# Altium PCB PCB1.PcbDoc
Units mil, origin at the board's own origin, x right, y up, seen from the top; angles counter-clockwise.
Board outline 6000 x 4000 mil, 2 copper layers (Top Layer, Bottom Layer); 88 components, 123 nets, 472 pads, 0 vias.
Unrouted connection lines stored in the file: 252.
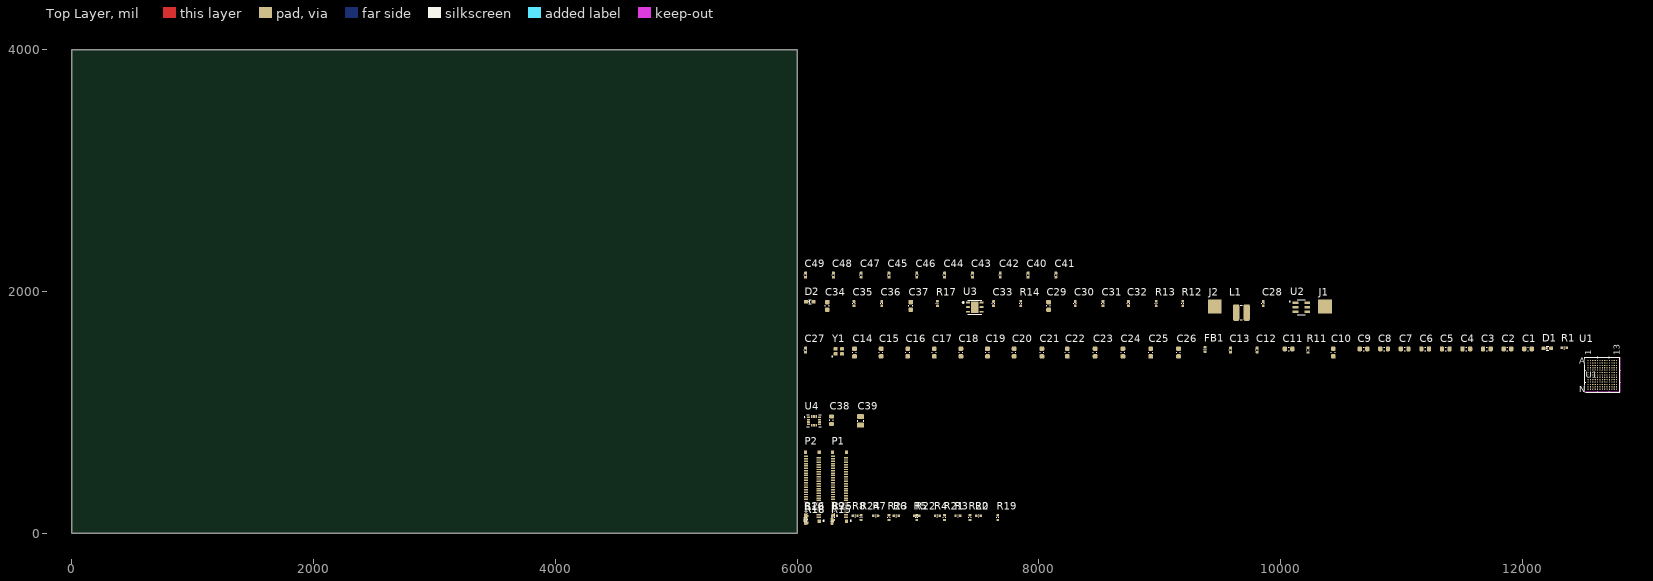
[diagram p0: Top Layer view]
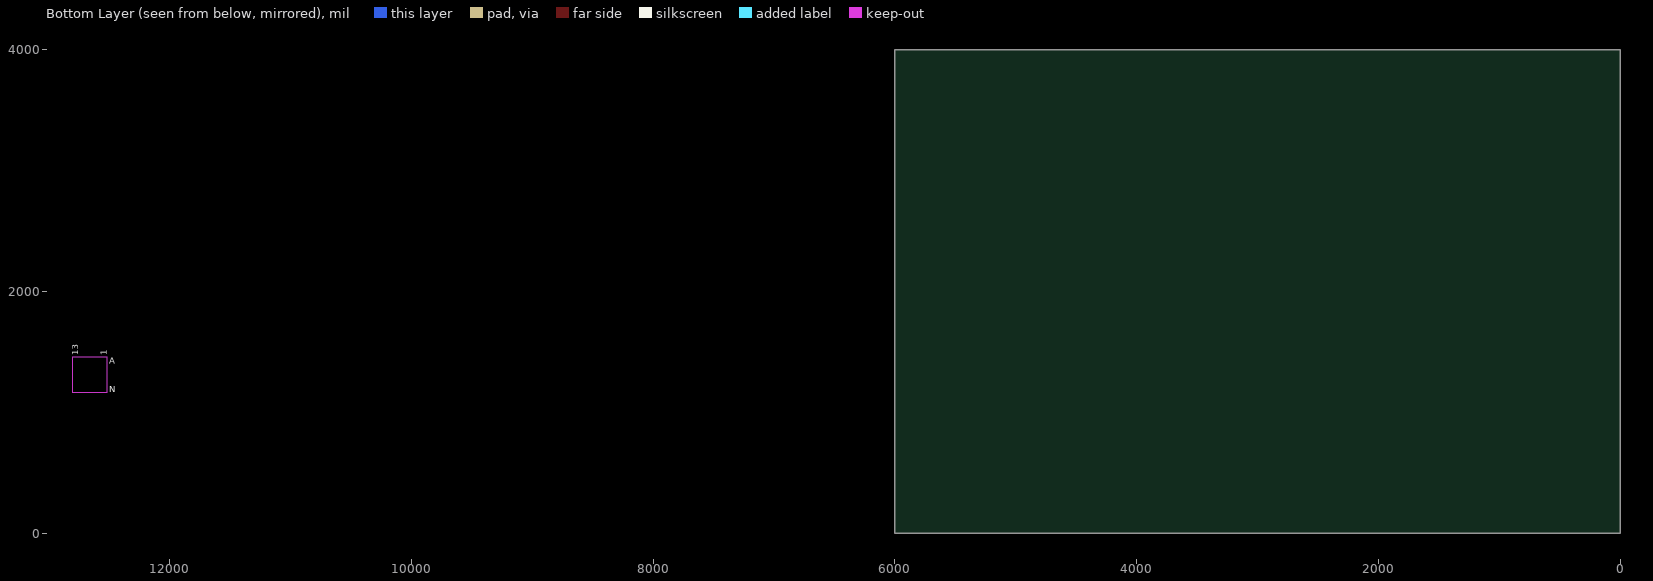
[diagram p1: Bottom Layer view, seen from below]

## Layer stack, top to bottom
Top Solder: solder mask 0.4, Solder Resist, Dk 3.5
Top Layer: signal copper 1.4
Dielectric 1: dielectric 12.6, FR-4, Dk 4.8
Bottom Layer: signal copper 1.4
Bottom Solder: solder mask 0.4, Solder Resist, Dk 3.5

## Board outline
0,0 6000,0 6000,4000 0,4000

## Design rules (kind name [scope] priority, off if disabled: settings)
Clearance [All] p1: gap=10 ignorepadtopadclearanceinfootprint=FALSE except(0: Arc-Hole Track-Hole SMDPad-Hole THPad-Hole Via-Hole Fill-Hole Poly-Hole Region-Hole Text-Hole)
DiffPairsRouting [All] p1: maxlimit=10 minlimit=10 mostfreqgap=10 toplayer_minwidth=15 toplayer_maxwidth=15 toplayer_prefwidth=15 bottomlayer_minwidth=15 bottomlayer_maxwidth=15 bottomlayer_prefwidth=15 maxuncoupledlength=500
PolygonConnect [All] p1: connectstyle=Relief reliefconductorwidth=10 reliefentries=4 polygonreliefangle="90 Angle" airgapwidth=10
RoomDefinition RS232 [InComponentClass('RS232')] p1: confinementstyle=ConfineIn formatcopy=TRUE lockcomponents=FALSE outline 6045,2090 8290,2090 8290,2280 6045,2280
RoomDefinition PWR [InComponentClass('PWR')] p2: confinementstyle=ConfineIn formatcopy=TRUE lockcomponents=FALSE outline 6045,1705 10435,1705 10435,2045 6045,2045
RoomDefinition MCU [InComponentClass('MCU')] p3: confinementstyle=ConfineIn formatcopy=TRUE lockcomponents=FALSE outline 6045,1150 12820,1150 12820,1660 6045,1660
RoomDefinition IMU [InComponentClass('IMU')] p4: confinementstyle=ConfineIn formatcopy=TRUE lockcomponents=FALSE outline 6045,860 6680,860 6680,1100 6045,1100
RoomDefinition Connector [InComponentClass('Connector')] p5: confinementstyle=ConfineIn formatcopy=TRUE lockcomponents=FALSE outline 6045,60 6460,60 6460,810 6045,810
RoutingVias [All] p1: holewidth=28 width=50 viastyle="Through Hole" minholewidth=28 minwidth=50 maxholewidth=28 maxwidth=50
SolderMaskExpansion [All] p1: expansion=4 istentingtop=FALSE
Width [All] p1: maxlimit=10 minlimit=10 preferedwidth=10
29 further rules are at their usual default settings.

## Classes and differential pairs
component class RS232: C40 C41 C42 C43 C44 C45 C46 C47 C48 C49 R19 R20 R21 R22 R23 R24 R25 R26 U6
component class PWR: C28 C29 C30 C31 C32 C33 C34 C35 C36 C37 D2 J1 J2 L1 R12 R13 R14 R15 R16 R17 R18 U2 U3
component class MCU: C1 C2 C3 C4 C5 C6 C7 C8 C9 C10 C11 C12 C13 C14 C15 C16 C17 C18 C19 C20 C21 C22 C23 C24 C25 C26 C27 D1 FB1 R1 R2 R3 R4 R5 R6 R7 R8 R9 R10 R11 U1 Y1
component class IMU: C38 C39 U4
component class Connector: P1 P2
differential pair ETHE2_TX: +ETHE2_TX_P -ETHE2_TX_N
differential pair ETHE2_RX: +ETHE2_RX_P -ETHE2_RX_N
differential pair ETHE1_TX: +ETHE1_TX_P -ETHE1_TX_N
differential pair ETHE1_RX: +ETHE1_RX_P -ETHE1_RX_N

## Components (designator, comment, footprint, x,y, rotation, side; value= is the part's Value field where it differs from the comment)
C1 "CAP0603 0.1uF 50V" CAP0603 12045,1525 r0 top value=0.1uF
C2 "CAP0603 2.2uF 25V" CAP0603 11875,1525 r0 top value=2.2uF
C3 "CAP0603 2.2uF 25V" CAP0603 11705,1525 r0 top value=2.2uF
C4 "CAP0603 2.2uF 25V" CAP0603 11535,1525 r0 top value=2.2uF
C5 "CAP0603 2.2uF 25V" CAP0603 11365,1525 r0 top value=2.2uF
C6 "CAP0603 0.1uF 50V" CAP0603 11195,1525 r0 top value=0.1uF
C7 "CAP0603 4.7uF 10V" CAP0603 11025,1525 r0 top value=4.7uF
C8 "CAP0603 1uF 50V" CAP0603 10855,1525 r0 top value=1uF
C9 "CAP0603 0.1uF 50V" CAP0603 10685,1525 r0 top value=0.1uF
C10 "CAP0603 0.1uF 50V" CAP0603 10435,1495 r90 top value=0.1uF
C11 "CAP0603 1uF 50V" CAP0603 10065,1525 r0 top value=1uF
C12 "CAP0402 0.1uF 50V" CAP0402 9805,1515 r90 top value=0.1uF
C13 "CAP0402 12pF 50V" CAP0402 9585,1515 r90 top value=12pF
C14 "CAP0603 1uF 50V" CAP0603 6475,1495 r90 top value=1uF
C15 "CAP0603 0.1uF 50V" CAP0603 6695,1495 r90 top value=0.1uF
C16 "CAP0603 4.7uF 10V" CAP0603 6915,1495 r90 top value=4.7uF
C17 "CAP0603 0.1uF 50V" CAP0603 7135,1495 r90 top value=0.1uF
C18 "CAP0603 0.1uF 50V" CAP0603 7355,1495 r90 top value=0.1uF
C19 "CAP0603 0.1uF 50V" CAP0603 7575,1495 r90 top value=0.1uF
C20 "CAP0603 0.1uF 50V" CAP0603 7795,1495 r90 top value=0.1uF
C21 "CAP0603 0.1uF 50V" CAP0603 8025,1495 r90 top value=0.1uF
C22 "CAP0603 0.1uF 50V" CAP0603 8235,1495 r90 top value=0.1uF
C23 "CAP0603 0.1uF 50V" CAP0603 8465,1495 r90 top value=0.1uF
C24 "CAP0603 0.1uF 50V" CAP0603 8695,1495 r90 top value=0.1uF
C25 "CAP0603 0.1uF 50V" CAP0603 8925,1495 r90 top value=0.1uF
C26 "CAP0603 0.1uF 50V" CAP0603 9155,1495 r90 top value=0.1uF
C27 "CAP0402 12pF 50V" CAP0402 6070,1515 r90 top value=12pF
C28 "CC0402KRX5R9BB104" CAP0402 9855,1900 r90 top
C29 "GRM188R6YA106MA73D" CAP0603 8080,1880 r90 top
C30 "CC0402KRX5R9BB104" CAP0402 8300,1900 r90 top
C31 "GRM158R61A226ME15D" CAP0402 8530,1900 r90 top
C32 "GRM158R61A226ME15D" CAP0402 8740,1900 r90 top
C33 "75pF" CAP0402 7625,1900 r90 top
C34 "GRM188R6YA106MA73D" CAP0603 6250,1880 r90 top
C35 "CC0402KRX5R9BB104" CAP0402 6470,1900 r90 top
C36 "CC0402KRX5R9BB104" CAP0402 6700,1900 r90 top
C37 "GRM188R6YA106MA73D" CAP0603 6940,1880 r90 top
C38 "C0603C104M5RACTU" CAP0603 6285,935 r90 top
C39 "CL21A476MQYNNNE" CAP0805 6525,930 r90 top
C40 "GRM155R71H104KE14D" CAP0402 7910,2135 r90 top
C41 "CC0402KRX5R8BB105" CAP0402 8140,2135 r90 top
C42 "GRM155R71H104KE14D" CAP0402 7680,2135 r90 top
C43 "GRM155R71H104KE14D" CAP0402 7450,2135 r90 top
C44 "GRM155R71H104KE14D" CAP0402 7220,2135 r90 top
C45 "GRM155R71H104KE14D" CAP0402 6760,2135 r90 top
C46 "CC0402KRX5R8BB105" CAP0402 6990,2135 r90 top
C47 "GRM155R71H104KE14D" CAP0402 6530,2135 r90 top
C48 "GRM155R71H104KE14D" CAP0402 6300,2135 r90 top
C49 "GRM155R71H104KE14D" CAP0402 6070,2135 r90 top
D1 "SML-310MTT86" "LED0603 GREEN" 12205,1530 r0 top
D2 "SML-310MTT86" "LED0603 GREEN" 6105,1915 r0 top
FB1 "BLM15PX121SZ1D" FERRIT0402 9375,1520 r90 top
J1 "CON1" "ESC PAD 3X4" 10365,1875 r0 top
J2 "CON1" "ESC PAD 3X4" 9455,1875 r0 top
L1 "SRN3012BTA-100M" SRN3012BTA-100M 9675,1825 r0 top
P1 "XSLS00-52-B" XSXL52 6355,385 r90 top
P2 "XSLS00-52-B" XSXL52 6130,385 r90 top
R1 "RES0402 4K7" RES0402 12345,1535 r0 top value=4K7
R2 "RES0402 0R" RES0402 7500,145 r0 top value=0R
R3 "RES0402 0R" RES0402 7330,145 r0 top value=0R
R4 "RES0402 0R" RES0402 7160,145 r0 top value=0R
R5 "RES0402 0R" RES0402 6990,145 r0 top value=0R
R6 "RES0402 0R" RES0402 6820,145 r0 top value=0R
R7 "RES0402 0R" RES0402 6650,145 r0 top value=0R
R8 "RES0402 0R" RES0402 6480,145 r0 top value=0R
R9 "RES0402 0R" RES0402 6310,145 r0 top value=0R
R10 "RES0603" RES0603 6075,115 r90 top value=1K
R11 "RES0402 4K7" RES0402 10225,1515 r90 top value=4K7
R12 "511K" RES0402 9190,1900 r90 top
R13 "49.9R" RES0402 8970,1900 r90 top
R14 "105K" RES0402 7850,1900 r90 top
R15 "100K" RES0402 6290,100 r90 top
R16 "13.3K" RES0402 6070,100 r90 top
R17 "RES0402 10K" RES0402 7160,1900 r90 top value=10K
R18 "RES0402" RES0402 6070,100 r90 top value=510
R19 "RES0402" RES0402 7660,130 r90 top value=0R
R20 "RES0402" RES0402 7430,130 r90 top value=0R
R21 "RES0402" RES0402 7220,130 r90 top value=0R
R22 "RES0402" RES0402 6990,130 r90 top value=0R
R23 "RES0402" RES0402 6760,130 r90 top value=0R
R24 "RES0402" RES0402 6530,130 r90 top value=0R
R25 "RES0402" RES0402 6300,130 r90 top value=0R
R26 "RES0402" RES0402 6070,130 r90 top value=0R
U1 "STM32H747AII6" UFBGA169 12660,1310 r0 top
U2 "TPS54302DDCR" "SOT95P280X110-6N - duplicate1" 10170,1870 r0 top
U3 "LD39200PUR" LD39200PUR 7470,1870 r0 top
U4 "ICM-42688-P" ICM-42688-P 6140,930 r0 top
Y1 "ECS-240-12-37B-CKY-TR" XTAL_ECS-240-12-37B-CKY-TR 6345,1505 r0 top

## Footprints (in the part's own frame and the unit in brackets; to place one, negate y for a bottom-side part, rotate by r counter-clockwise, add the part's x,y. Pads: shape width x height; smd on the part's side, far side on the other; paste and mask are expansions set on the pad)
CAP0402 [mm]
  rrect50% 0.6x0.6 smd mask+0.05: 1(0.45,0) 2(-0.45,0)
  silkscreen extent -0.04,-0.25 0.04,0.25, body extent -0.5,-0.25 0.5,0.25, height 0.55
CAP0603 [mm]
  rrect50% 0.9x1 smd mask+0.05: 1(-0.8,0) 2(0.8,0)
  silkscreen extent -0.1,-0.39 0.1,0.39, body extent -0.8,-0.4 0.8,0.4, height 0.8
CAP0805 [mm]
  rrect50% 1.1x1.5 smd mask+0.05: 1(-0.9,0) 2(0.9,0)
  silkscreen extent -0.15,-0.62 0.15,0.61, body extent -1,-0.62 1,0.63, height 0.9
"ESC PAD 3X4" [mm]
  rect 2.9x2.9 smd: 1(0,0)
FERRIT0402 [mm]
  rrect50% 0.54x0.6 smd mask+0.05: 1(-0.432,0) 2(0.432,0)
  silkscreen extent -0.06,-0.24 0.06,0.24, body extent -0.5,-0.25 0.5,0.25, height 0.5
ICM-42688-P [mm]
  rrect50% 0.59x0.35 smd mask+0.04: 1(-1.165,0.75) 2(-1.165,0.25) 3(-1.165,-0.25) 4(-1.165,-0.75) 8(1.165,-0.75) 9(1.165,-0.25) 10(1.165,0.25) 11(1.165,0.75)
  rrect50% 0.35x0.59 smd mask+0.04: 5(-0.5,-0.915) 6(0,-0.915) 7(0.5,-0.915) 12(0.5,0.915) 13(0,0.915) 14(-0.5,0.915)
  silkscreen extent -2.1,-1.25 1.5,1.25, body extent -1.5,-1.25 1.5,1.25, height 0.97
LD39200PUR [mm]
  rrect50% 0.84x0.4 smd: 1(-1.435,0.95) 2(-1.435,0) 3(-1.435,-0.95) 4(1.435,-0.95) 5(1.435,0) 6(1.435,0.95)
  rect 1.625x2.365 smd paste-2: 7(0,0)
  silkscreen extent -2.59,-1.5 1.5,1.5, body extent -1.5,-1.5 1.5,1.5, height 1
"LED0603 GREEN" [mm]
  rrect50% 0.8x0.82 smd mask+0.05: 1(0.8,0) 2(-0.8,0)
  silkscreen extent -0.34,-0.4 0.26,0.4, body extent -0.8,-0.4 0.8,0.4, height 0.7
RES0402 [mm]
  rrect50% 0.5x0.6 smd mask+0.05: 1(-0.5,0) 2(0.5,0)
  silkscreen extent -0.08,-0.24 0.08,0.24, body extent -0.5,-0.25 0.5,0.25, height 0.35
RES0603 [mm]
  rrect50% 0.65x0.9 smd mask+0.05: 1(-0.725,0) 2(0.725,0)
  silkscreen extent -0.15,-0.35 0.15,0.35, body extent -0.8,-0.45 0.8,0.45, height 0.5
"SOT95P280X110-6N - duplicate1" [mm]
  rrect25% 1.25x0.59 smd: 1(-1.255,0.95) 2(-1.255,0) 3(-1.255,-0.95) 4(1.255,-0.95) 5(1.255,0) 6(1.255,0.95)
  silkscreen extent -2.5,-1.57 0.8,1.57, body extent -1.4,-1.45 1.4,1.45, height 1.1
SRN3012BTA-100M [mm]
  rrect50% 1.3x3.5 smd mask+0.051: 1(-1.1,0) 2(1.1,0)
  silkscreen extent -0.2,-1.5 0.2,1.5, body extent -1.48,-1.48 1.48,1.47, height 1.11
UFBGA169 [mil]
  round 10 smd paste+0 mask+0: A1(-118.11,118.11) A2(-98.43,118.11) A3(-78.74,118.11) A4(-59.06,118.11) A5(-39.37,118.11) A6(-19.68,118.11) A7(0,118.11) A8(19.68,118.11) A9(39.37,118.11) A10(59.06,118.11) A11(78.74,118.11) A12(98.43,118.11) A13(118.11,118.11) B1(-118.11,98.43) B2(-98.43,98.43) B3(-78.74,98.43) B4(-59.06,98.43) B5(-39.37,98.43) B6(-19.68,98.43) B7(0,98.43) B8(19.68,98.43) B9(39.37,98.43) B10(59.06,98.43) B11(78.74,98.43) B12(98.43,98.43) B13(118.11,98.43) C1(-118.11,78.74) C2(-98.43,78.74) C3(-78.74,78.74) C4(-59.06,78.74) C5(-39.37,78.74) C6(-19.68,78.74) C7(0,78.74) C8(19.68,78.74) C9(39.37,78.74) C10(59.06,78.74) C11(78.74,78.74) C12(98.43,78.74) C13(118.11,78.74) D1(-118.11,59.06) D2(-98.43,59.06) D3(-78.74,59.06) D4(-59.06,59.06) D5(-39.37,59.06) D6(-19.68,59.06) D7(0,59.06) D8(19.68,59.06) D9(39.37,59.06) D10(59.06,59.06) D11(78.74,59.06) D12(98.43,59.06) D13(118.11,59.06) E1(-118.11,39.37) E2(-98.43,39.37) E3(-78.74,39.37) E4(-59.06,39.37) E5(-39.37,39.37) E6(-19.68,39.37) E7(0,39.37) E8(19.68,39.37) E9(39.37,39.37) E10(59.06,39.37) E11(78.74,39.37) E12(98.43,39.37) E13(118.11,39.37) F1(-118.11,19.68) F2(-98.43,19.68) F3(-78.74,19.68) F4(-59.06,19.68) F5(-39.37,19.68) F6(-19.68,19.68) F7(0,19.68) F8(19.68,19.68) F9(39.37,19.68) F10(59.06,19.68) F11(78.74,19.68) F12(98.43,19.68) F13(118.11,19.68) G1(-118.11,0) G2(-98.43,0) G3(-78.74,0) G4(-59.06,0) G5(-39.37,0) G6(-19.68,0) G7(0,0) G8(19.68,0) G9(39.37,0) G10(59.06,0) G11(78.74,0) G12(98.43,0) G13(118.11,0) H1(-118.11,-19.68) H2(-98.43,-19.68) H3(-78.74,-19.68) H4(-59.06,-19.68) H5(-39.37,-19.68) H6(-19.68,-19.68) H7(0,-19.68) H8(19.68,-19.68) H9(39.37,-19.68) H10(59.06,-19.68) H11(78.74,-19.68) H12(98.43,-19.68) H13(118.11,-19.68) J1(-118.11,-39.37) J2(-98.43,-39.37) J3(-78.74,-39.37) J4(-59.06,-39.37) J5(-39.37,-39.37) J6(-19.68,-39.37) J7(0,-39.37) J8(19.68,-39.37) J9(39.37,-39.37) J10(59.06,-39.37) J11(78.74,-39.37) J12(98.43,-39.37) J13(118.11,-39.37) K1(-118.11,-59.06) K2(-98.43,-59.06) K3(-78.74,-59.06) K4(-59.06,-59.06) K5(-39.37,-59.06) K6(-19.68,-59.06) K7(0,-59.06) K8(19.68,-59.06) K9(39.37,-59.06) K10(59.06,-59.06) K11(78.74,-59.06) K12(98.43,-59.06) K13(118.11,-59.06) L1(-118.11,-78.74) L2(-98.43,-78.74) L3(-78.74,-78.74) L4(-59.06,-78.74) L5(-39.37,-78.74) L6(-19.68,-78.74) L7(0,-78.74) L8(19.68,-78.74) L9(39.37,-78.74) L10(59.06,-78.74) L11(78.74,-78.74) L12(98.43,-78.74) L13(118.11,-78.74) M1(-118.11,-98.43) M2(-98.43,-98.43) M3(-78.74,-98.43) M4(-59.06,-98.43) M5(-39.37,-98.43) M6(-19.68,-98.43) M7(0,-98.43) M8(19.68,-98.43) M9(39.37,-98.43) M10(59.06,-98.43) M11(78.74,-98.43) M12(98.43,-98.43) M13(118.11,-98.43) N1(-118.11,-118.11) N2(-98.43,-118.11) N3(-78.74,-118.11) N4(-59.06,-118.11) N5(-39.37,-118.11) N6(-19.68,-118.11) N7(0,-118.11) N8(19.68,-118.11) N9(39.37,-118.11) N10(59.06,-118.11) N11(78.74,-118.11) N12(98.43,-118.11) N13(118.11,-118.11)
  Keep-Out Layer region: -145.45,-145.45 -145.45,145.45 145.45,145.45 145.45,-145.45
  silkscreen extent -149,-149 149,149, body extent -139,-139 139,139, height 24
XSXL52 [mm]
  rect 0.7x0.66 smd: 0(-7.222,-1.346) 0(-7.205,1.549) 0(7.234,-1.344) 0(7.234,1.549)
  rect 0.3x0.86 smd: 1(-6.38,-1.242) 2(-6.13,1.448) 3(-5.88,-1.242) 4(-5.63,1.448) 5(-5.38,-1.242) 6(-5.13,1.448) 7(-4.88,-1.242) 8(-4.63,1.448) 9(-4.38,-1.242) 10(-4.13,1.448) 11(-3.88,-1.242) 12(-3.63,1.448) 13(-3.38,-1.242) 14(-3.13,1.448) 15(-2.88,-1.242) 16(-2.63,1.448) 17(-2.38,-1.242) 18(-2.13,1.448) 19(-1.88,-1.242) 20(-1.63,1.448) 21(-1.38,-1.242) 22(-1.13,1.448) 23(-0.88,-1.242) 24(-0.63,1.448) 25(-0.38,-1.242) 26(-0.13,1.448) 27(0.12,-1.242) 28(0.37,1.448) 29(0.62,-1.242) 30(0.87,1.448) 31(1.12,-1.242) 32(1.37,1.448) 33(1.62,-1.242) 34(1.87,1.448) 35(2.12,-1.242) 36(2.37,1.448) 37(2.62,-1.242) 38(2.87,1.448) 39(3.12,-1.242) 40(3.37,1.448) 41(3.621,-1.242) 42(3.871,1.448) 43(4.121,-1.242) 44(4.371,1.448) 45(4.621,-1.242) 46(4.871,1.448) 47(5.121,-1.242) 48(5.371,1.448) 49(5.621,-1.242) 50(5.871,1.448) 51(6.121,-1.242) 52(6.371,1.448)
  silkscreen extent -7.3,-2.39 -7.05,-2.14, body extent -8.08,-1.37 8.07,1.68, height 0.85
XTAL_ECS-240-12-37B-CKY-TR [mm]
  rrect50% 0.85x0.75 smd mask+0.051: 1(-0.675,-0.525) 2(0.675,-0.525) 3(0.675,0.525) 4(-0.675,0.525)
  silkscreen extent -1.45,-1.19 -1.31,-1.04, body extent -1,-0.8 1,0.8, height 0.5

## Part data
C1 C6 C9 C10 C15 C17 C18 C19 C20 C21 C22 C23 C24 C25 C26: "Cap 0.1uF 50V 0603", Package=0603, Voltage=50V, MP=C0603C104M5RAC7867
C2 C3 C4 C5: "Cap 2.2uF 25V 0603", MP=GRM188R61E225KA12DGRM188R61E225KA12D
C7 C16: "Cap 4.7uF 10V 0603", MP=CC0603KRX5R6BB475
C8 C11 C14: "Cap 1uF 50V 0603", Package=0603, Tolerance=±10%, Voltage - Rated=50V, MP=C1608X5R1H105K080AB
C12: "Cap 0.1uF 50V 0402", Package=0402, Voltage=50V, MP=CC0402KRX5R9BB104
C13 C27: "Cap 12pF 50V 0402"
C28 C30 C35 C36: library part CMP-00265-1, "CAP CER 0.1UF 50V X5R 0402", Capacitance=100nF, Case/Package=0402, Dielectric=X5R, Manufacturer=Yageo, Max Operating Temperature=85°C, Min Operating Temperature=-55°C, Tolerance=10%, Voltage Rating=50V, Halogen Free="Halogen Free", Lead Free="Lead Free", Length=0.039inch, Manufacturer 1=Yageo, Manufacturer Part Number=CC0402KRX5R9BB104, Manufacturer Part Number 1=CC0402KRX5R9BB104, Mount="Surface Mount", Packaging="Tape and Reel", Thickness=0.022inch, Voltage Rating (DC)=50V, Width=0.02inch
C29 C34 C37: library part CMP-01031-1, "CAP CER 10UF 35V X5R 0603", Capacitance=10uF, Case Code (Imperial)=0603, Case Code (Metric)=1608, Dielectric=X5R, Manufacturer 1="Murata Electronics", Max Operating Temperature=85°C, Min Operating Temperature=-55°C, Package Quantity=1, Tolerance=20%, Voltage=35V, Case/Package=0603, Composition=Ceramic, Depth=0.8mm, Height=0.8mm, Lead Free="Lead Free", Length=1.6mm, Manufacturer Part Number 1=GRM188R6YA106MA73D, Mount="Surface Mount", Number of Pins=2, Packaging="Tape and Reel", REACH SVHC="No SVHC", Termination=SMD/SMT, Thickness=0.031inch, Voltage Rating=35V, Voltage Rating (DC)=35V, Weight=0.000222oz, Width=0.031inch
C31 C32: library part CMP-00520-1, "CAP CER 22UF 10V X5R 0402", Capacitance=22uF, Case Code (Imperial)=0402, Case Code (Metric)=1005, Dielectric=X5R, Manufacturer 1="TDK Corporation", Max Operating Temperature=85°C, Min Operating Temperature=-55°C, Tolerance=10%, Voltage=10V, Case/Package=0402, Depth=0.5mm, Length=1mm, Manufacturer Part Number 1=GRM158R61A226ME15D, Packaging="Tape and Reel", Radiation Hardening=No, REACH SVHC="No SVHC", Termination=SMD/SMT, Voltage Rating=10V
C33: library part CAP_Dup1_16, "CAP CER 75PF 25V C0G/NP0 0402", Dielectric Type=Capacitors, Manufacturer=YAGEO, Manufacturer PN=CC0402JRNPO9BN750, Package Size="0402 (1005 Metric)", Rated Voltage=25V, Temperature Coefficient="C0G, NP0", Tolerance=5%, CLASS=DISCRETE, PART_NUMBER=TMP-416
C38: library part CMP-00691-1, "CAP CER 0.1UF 50V X7R 0603", Capacitance=100nF, Case Code (Imperial)=0603, Case Code (Metric)=1608, Dielectric=X7R, Dielectric Material=Ceramic, Manufacturer 1=KEMET, Max Operating Temperature=125°C, Min Operating Temperature=-55°C, Package Quantity=1, Tolerance=20%, Voltage Rating=50V, Case/Package=0603, Contact Plating=Tin,Matte, Depth=0.8mm, Dissipation Factor=2.5%, Height=0.8mm, Lead Pitch=0.7mm, Length=1.6mm, Manufacturer Part Number 1=C0603C104M5RACTU, Mount="Surface Mount,PCB", Packaging="Tape and Reel", Radiation Hardening=No, REACH SVHC="No SVHC", Termination=SMD/SMT, Thickness=0.034inch, Voltage Rating (DC)=50V, Width=0.031inch
C39: library part 885012107014, "CAP CER 47UF 6.3V X5R 0805", Capacitance=47uF, Case Code (Imperial)=0805, Case Code (Metric)=2012, Dielectric=X5R, Max Operating Temperature=85°C, Min Operating Temperature=-55°C, Tolerance=20%, Voltage Rating=6.3V, Case/Package=0805, Category="Ceramic Capacitors", ComponentLink1Description=http://www.farnell.com/datasheets/1958454.pdf?src-supplier=Farnell, ComponentLink1URL=http://www.farnell.com/datasheets/1958454.pdf?src-supplier=Farnell, ComponentLink2Description=http://www.farnell.com/datasheets/1958454.pdf?src-supplier=Element14, ComponentLink2URL=http://www.farnell.com/datasheets/1958454.pdf?src-supplier=Element14, ComponentLink3Description=https://katalog.we-online.de/pbs/datasheet/885012107014.pdf?src-supplier=Digi-Key, ComponentLink3URL=https://katalog.we-online.de/pbs/datasheet/885012107014.pdf?src-supplier=Digi-Key, ComponentLink4Description=http://www.farnell.com/datasheets/1958454.pdf?src-supplier=Newark, ComponentLink4URL=http://www.farnell.com/datasheets/1958454.pdf?src-supplier=Newark, Length=0.079inch, Manufacturer Part Number=CL21A476MQYNNNE, Mount="Surface Mount", Packaging="Cut Tape", Pricing 1="1=0.37000, 5=0.35200, 10=0.33000, 25=0.31900, 50=0.30900, 100=0.29800 (USD)", RoHS=Yes, RoHS Compliant=Yes, Series=WCAP-CSGP, Stock 1=3580, Supplier 1=Newark, Thickness=0.057inch, Voltage Rating (DC)=6.3V, Width=0.049inch
C40 C42 C43 C44 C45 C47 C48 C49: library part CMP-01036-1, "CAP CER 0.1UF 50V X7R 0402", Capacitance=100nF, Case Code (Imperial)=0402, Case Code (Metric)=1005, Dielectric=X7R, Dielectric Material=Ceramic, Manufacturer 1="Murata Electronics", Max Operating Temperature=125°C, Min Operating Temperature=-55°C, Package Quantity=10000, Tolerance=10%, Voltage=50V, Case/Package=0402, Composition=Ceramic, Depth=0.5mm, Dissipation Factor=0.025%, Height=0.5mm, Lead Free="Lead Free", Length=1mm, Manufacturer Part Number 1=GRM155R71H104KE14D, Material=Ceramic, Mount="Surface Mount", Packaging="Tape and Reel", REACH SVHC="No SVHC", Termination=SMD/SMT, Thickness=0.022inch, Voltage Rating=50V, Voltage Rating (DC)=50V, Weight=0.000212oz, Width=0.5mm
C41 C46: library part CMP-00520-1, "CAP CER 1UF 25V X5R 0402", Capacitance=1uF, Case Code (Imperial)=0402, Case Code (Metric)=1005, Dielectric=X5R, Manufacturer 1="TDK Corporation", Max Operating Temperature=85°C, Min Operating Temperature=-55°C, Tolerance=10%, Voltage=25V, Case/Package=0402, Depth=0.5mm, Length=1mm, Manufacturer Part Number 1=CC0402KRX5R8BB105, Packaging="Tape and Reel", Radiation Hardening=No, REACH SVHC="No SVHC", Termination=SMD/SMT, Voltage Rating=25V
D1 D2: library part CMP-01130-2, "LED GREEN CLEAR 0603 SMD", Case Code (Imperial)=0603, Case Code (Metric)=1608, Color=Green,Yellow, Forward Current=20mA, Forward Voltage=2.2V, Illumination Color=Green, Lens Color=Colorless,Clear, Manufacturer 1="Rohm Semiconductor", Max Operating Temperature=85°C, Min Operating Temperature=-30°C, Package Quantity=3000, Case/Package=0603, Dominant Wavelength=570nm, Height=0.9mm, Lead Free="Lead Free", Length=1.6mm, Lens Style=Rectangular,Clear,Diffused,Colorless, Lens Transparency=Clear, Luminous Intensity=16mcd, Manufacturer Part Number 1=SML-310MTT86, Mount="Surface Mount", Number of LEDs=1, Number of Pins=2, Packaging="Tape and Reel", Radiation Hardening=No, Test Current=20mA, Viewing Angle=140°, Wavelength=570nm, Width=0.8mm
FB1: "120 Ohms @ 100 MHz 1 Power Line Ferrite Bead 0402 (1005 Metric) 2A 55mOhm", Current Rating (Max)=2A, DC Resistance (DCR) (Max)=55mOhm, Impedance @ Frequency="120 Ohms @ 100 MHz", MP=BLM15PX121SZ1D
J1 J2: "SOLDER PADS"
L1: library part SRN3012BTA-330M, "10uH", Manufacturer_Name=Bourns, Datasheet Link=https://www.bourns.com/docs/Product-Datasheets/SRN3012BTA.pdf, Geometry.Height=1.2mm, Manufacturer_Part_Number=SRN3012BTA-100M, Mouser Part Number=SRN3012BTA-100M, Mouser Price/Stock=https://www.mouser.co.uk/ProductDetail/Bourns/SRN3012BTA-330M?qs=Imq1NPwxi74rPoSZ4PPaRw%3D%3D
R1 R11: "RES 4K7 0402", MP=RC0402JR-074K7L
R2 R3 R4 R5 R6 R7 R8 R9: "RES 0R 0402", MP=RC0402JR-070RL
R10: "RES 0805", MP="add later"
R12: library part CMP-00299-1_1, "RES SMD 511K OHM 1% 1/16W 0402", Case Code (Imperial)=0402, Case Code (Metric)=1005, Manufacturer=Yageo, Manufacturer Part Number=RC0402FR-07511KL, Max Operating Temperature=155°C, Max Power Dissipation=63mW, Min Operating Temperature=-55°C, Package Quantity=1, Power Rating=62.5mW, Temperature Coefficient=100ppm/°C, Tolerance=1%, Voltage Rating=50V, Case/Package=0402, Composition="Thick Film", Depth=0.5mm, Features="Moisture Resistant", Height=0.016inch, Lead Free="Lead Free", Length=1mm, Manufacturer 1=Yageo, Manufacturer Part Number 1=RC0402FR-07511KL, Military Standard=Not, Number of Terminations=2, Packaging="Tape and Reel", Resistance=511K, Termination=SMD/SMT, Voltage Rating (DC)=50V, Width=0.02inch, Working Voltage=50V
R13: library part CMP-00299-1_1, "RES SMD 49.9R OHM 1% 1/16W 0402", Case Code (Imperial)=0402, Case Code (Metric)=1005, Manufacturer=Yageo, Manufacturer Part Number=RC0402FR-0749R9L, Max Operating Temperature=155°C, Max Power Dissipation=63mW, Min Operating Temperature=-55°C, Package Quantity=1, Power Rating=62.5mW, Temperature Coefficient=100ppm/°C, Tolerance=1%, Voltage Rating=50V, Case/Package=0402, Composition="Thick Film", Depth=0.5mm, Features="Moisture Resistant", Height=0.016inch, Lead Free="Lead Free", Length=1mm, Manufacturer 1=Yageo, Manufacturer Part Number 1=RC0402FR-0749R9L, Military Standard=Not, Number of Terminations=2, Packaging="Tape and Reel", Resistance=49.9R, Termination=SMD/SMT, Voltage Rating (DC)=50V, Width=0.02inch, Working Voltage=50V
R14: library part CMP-00299-1_1, "RES SMD 105K OHM 1% 1/16W 0402", Case Code (Imperial)=0402, Case Code (Metric)=1005, Manufacturer=Yageo, Manufacturer Part Number=RC0402FR-07105KL, Max Operating Temperature=155°C, Max Power Dissipation=63mW, Min Operating Temperature=-55°C, Package Quantity=1, Power Rating=62.5mW, Temperature Coefficient=100ppm/°C, Tolerance=1%, Voltage Rating=50V, Case/Package=0402, Composition="Thick Film", Depth=0.5mm, Features="Moisture Resistant", Height=0.016inch, Lead Free="Lead Free", Length=1mm, Manufacturer 1=Yageo, Manufacturer Part Number 1=RC0402FR-07105KL, Military Standard=Not, Number of Terminations=2, Packaging="Tape and Reel", Resistance=105K, Termination=SMD/SMT, Voltage Rating (DC)=50V, Width=0.02inch, Working Voltage=50V
R15: library part CMP-00299-1_1, "RES SMD 100K OHM 1% 1/16W 0402", Case Code (Imperial)=0402, Case Code (Metric)=1005, Manufacturer=Yageo, Manufacturer Part Number=RC0402FR-0749R9L, Max Operating Temperature=155°C, Max Power Dissipation=63mW, Min Operating Temperature=-55°C, Package Quantity=1, Power Rating=62.5mW, Resistance=49.9R, Temperature Coefficient=100ppm/°C, Tolerance=1%, Voltage Rating=50V, Case/Package=0402, Composition="Thick Film", Depth=0.5mm, Features="Moisture Resistant", Height=0.016inch, Lead Free="Lead Free", Length=1mm, Manufacturer 1=Yageo, Manufacturer Part Number 1=RC0402FR-0749R9L, Military Standard=Not, Number of Terminations=2, Packaging="Tape and Reel", Termination=SMD/SMT, Voltage Rating (DC)=50V, Width=0.02inch, Working Voltage=50V
R16: library part CMP-00299-1_1, "RES SMD 13.3K OHM 1% 1/16W 0402", Case Code (Imperial)=0402, Case Code (Metric)=1005, Manufacturer=Yageo, Manufacturer Part Number=RC0402FR-0749R9L, Max Operating Temperature=155°C, Max Power Dissipation=63mW, Min Operating Temperature=-55°C, Package Quantity=1, Power Rating=62.5mW, Resistance=49.9R, Temperature Coefficient=100ppm/°C, Tolerance=1%, Voltage Rating=50V, Case/Package=0402, Composition="Thick Film", Depth=0.5mm, Features="Moisture Resistant", Height=0.016inch, Lead Free="Lead Free", Length=1mm, Manufacturer 1=Yageo, Manufacturer Part Number 1=RC0402FR-0749R9L, Military Standard=Not, Number of Terminations=2, Packaging="Tape and Reel", Termination=SMD/SMT, Voltage Rating (DC)=50V, Width=0.02inch, Working Voltage=50V
R17: "RES 10K 0402", MP=RC0402FR-0710KL
R18 R19 R20 R21 R22 R23 R24 R25 R26: "RES 0402", MP="add later"
U1: "High-performance and DSP with DP-FPU, Arm Cortex-M7 + Cortex-M4 MCU with 2MBytes of Flash memory, 1MB RAM, 480 MHz CPU, Art Accelerator, L1 cache, external memory interface, large set of peripherals, SMPS, MIPI-DSI", Manufacturer_Name=STMicroelectronics, Copyright="Copyright (C) 2026 Ultra Librarian. All rights reserved.", Manufacturer_Part_Number=STM32H747AII6, RefDes=RefDes, Type=Type
U2: "4.5-V to 28-V Input, 3-A Output, EMI Friendly Synchronous Step-Down Converter", Package="SOT-23-THN-6 Texas Instruments", Availability="In Stock", Check_prices=https://www.snapeda.com/parts/TPS54302DDCR/Texas+Instruments/view-part/?ref=eda, MF="Texas Instruments", MP=TPS54302DDCR, Price=None, Purchase-URL=https://pricing.snapeda.com/search?q=TPS54302DDCR&ref=eda, SnapEDA_Link=https://www.snapeda.com/parts/TPS54302DDCR/Texas+Instruments/view-part/?ref=snap
U3: "LDO IC 1 Output 2A 6-DFN _3x3_", Package="DFN-6 STMicroelectronics", Availability=Unavailable, MF=STMicroelectronics, MP=LD39200PUR, Price=None, SnapEDA_Link=https://www.snapeda.com/parts/LD39200PUR/STMicroelectronics/view-part/882017/?ref=snap
U4: "Accelerometer, Gyroscope, 6 Axis Sensor Output", Package=None, Availability=Unavailable, MP=ICM-42688-P, Price=None
Y1: "Crystal 24 MHz ±10ppm 12pF 50 Ohms 4-SMD, No Lead", ESR (Equivalent Series Resistance)="50 Ohms", Frequency="24 MHz", Frequency Stability=±10ppm, Load Capacitance=12pF, Operating Temperature="-30°C ~ 85°C", Frequency Tolerance=±10ppm, MP=ECS-240-12-37B-CKY-TR, Size / Dimension="2.00mm x 1.60mm"

## Nets (pads, with @x,y where several pads share a name; then routed paths per layer and width w, separated by ;. In a path a pad name is that pad's centre, name@x,y a point inside that pad or via, vN(x,y) a via of type N, cw(c..) or ccw(c..) an arc to the next point about the centre after c; other vN are vias at no path point)
12V: C29.1 C30.1 J1.1 R12.1 U2.3
+5V_SYS: C31.1 C32.1 C34.1 C35.1 L1.2 R13.1 R17.2 U3.6
C_Main_SWCLK: P1.20 U1.A11
C_Main_SWDIO: P1.18 U1.B11
C_Roll_TIM4_CH1: P2.24 U1.J10
C_Roll_TIM4_CH2: P2.26 U1.J9
C_Roll_TIM4_CH3: P2.28 U1.H9
C_Yaw_TIM1_CH1: P1.24 U1.N6
C_Yaw_TIM1_CH2: P1.26 U1.N7
C_Yaw_TIM1_CH3: P1.28 U1.H8
CAM_TRIGGER: P1.41 P2.41
CAN_H: P1.39 P2.39
CAN_L: P1.37 P2.37
ETHE1_RX_N: P1.9 P2.9
ETHE1_RX_P: P1.7 P2.7
ETHE1_TX_N: P1.3 P2.3
ETHE1_TX_P: P1.1 P2.1
ETHE2_RX_N: P1.25 P2.25
ETHE2_RX_P: P1.23 P2.23
ETHE2_TX_N: P1.19 P2.19
ETHE2_TX_P: P1.17 P2.17
GND: C1.1 C5.1 C6.1 C7.1 C8.1 C9.1 C12.1 C13.2 C14.1 C15.1 C16.1 C17.1 C18.1 C19.1 C20.1 C21.1 C22.1 C23.1 C24.1 C25.1 C26.1 C27.2 C29.2 C30.2 C31.2 C32.2 C34.2 C35.2 C36.2 C37.2 C38.2 C39.2 C40.2 C41.2 C44.2 C45.2 C46.2 C49.2 D1.1 D2.1 J2.1 P1.5 P1.22 P1.30 P1.35 P1.36 P1.42 P1.43 P1.48 P2.5 P2.18 P2.30 P2.35 P2.40 P2.43 P2.48 R1.1 R14.2 R16.2 U1.A1 U1.A7 U1.A12 U1.B4 U1.B9 U1.C12 U1.D1 U1.E13 U1.F1 U1.F2 U1.F3 U1.G12 U1.G13 U1.H2 U1.H11 U1.J11 U1.K11 U1.L1 U1.L13 U1.M6 U1.M9 U1.N1 U2.1 U3.3 U3.7 U4.2 U4.3 U4.6 U4.7 U4.10 U4.11 Y1.2 Y1.4
I2C1_SCL: P1.51 U1.E5
I2C1_SDA: P1.49 U1.C5
I2C2_SCL: P1.47 U1.F5
I2C2_SDA: P1.45 U1.F4
I2C3_SCL: P2.51 U1.D10
I2C3_SDA: P2.49 U1.E11
I2C4_SCL: P2.47 U1.N5
I2C4_SDA: P2.45 U1.M7
IMU1_INT1: U1.L3 U4.4
IMU1_INT2_FSYNC: U1.K3 U4.9
MCU1_Main_Left_SWCLK: P1.4 P2.4
MCU1_Main_Left_SWDIO: P1.2 P2.2
MCU1_Main_Right_SWCLK: P1.12 P2.12
MCU1_Main_Right_SWDIO: P1.10 P2.10
MCU2_Main_Left_SWCLK: P1.8 P2.8
MCU2_Main_Left_SWDIO: P1.6 P2.6
MCU2_Main_Right_SWCLK: P1.16 P2.16
MCU2_Main_Right_SWDIO: P1.14 P2.14
NetC2_1: C2.1 U1.A4
NetC2_2: C2.2 C3.2 C4.2
NetC3_1: C3.1 U1.C13
NetC4_1: C4.1 U1.N9
NetC10_1: C10.1 C11.1
NetC28_1: C28.1 U2.6
NetC28_2: C28.2 L1.1 U2.2
NetC33_1: C33.1 R15.2 R16.1 U2.4
NetC33_2: C33.2 R13.2 R15.1
NetC40_1: C40.1
NetC42_1: C42.1
NetC42_2: C42.2
NetC43_1: C43.1
NetC43_2: C43.2
NetC44_1: C44.1
NetC45_1: C45.1
NetC47_1: C47.1
NetC47_2: C47.2
NetC48_1: C48.1
NetC48_2: C48.2
NetC49_1: C49.1
NetD1_2: D1.2 R10.2
NetD2_2: D2.2 R18.2
NetP1_27: P1.27 U1.B6
NetP1_29: P1.29 U1.A6
NetP1_32: P1.32 U1.N4
NetP1_34: P1.34 U1.H6
NetP1_44: P1.44 U1.D5
NetP1_46: P1.46 U1.D6
NetP1_50: P1.50 U1.L5
NetP1_52: P1.52 U1.A5
NetR1_2: R1.2 U1.B5
NetR2_1: R2.1 R23.1
NetR3_1: R3.1 R24.1
NetR4_2: R4.2 R21.1
NetR5_2: R5.2 R22.1
NetR6_2: R6.2 R19.1
NetR7_2: R7.2 R20.1
NetR8_1: R8.1 R25.1
NetR9_1: R9.1 R26.1
NetR10_1: R10.1 U1.D9
NetR12_2: R12.2 R14.1 U2.5
NetR17_1: R17.1 U3.5
NetR19_2: R19.2
NetR20_2: R20.2
NetR21_2: R21.2
NetR22_2: R22.2
NetR23_2: R23.2
NetR24_2: R24.2
NetR25_2: R25.2
NetR26_2: R26.2
NRST: C12.2 R11.1 U1.H5
PH0: C27.1 U1.J2 Y1.1
PH1: C13.1 U1.J1 Y1.3
PWM_1: P1.15 P2.15
PWM_2: P1.31 P2.31
RS232_ENC_Left_RX: P2.13
RS232_ENC_Left_TX: P2.11
RS232_ENC_Right_RX: P2.29
RS232_ENC_Right_TX: P2.27
RS232_RX1: P2.38
RS232_RX2: P2.44
RS232_TX1: P2.36
RS232_TX2: P2.42
RX_AI: P1.40 U1.B8
SBUS_1: P1.21 P2.21
SBUS_2: P1.33 P2.33
SPI1_CS: U1.N3 U4.12
SPI1_MISO: U1.M4 U4.1
SPI1_MOSI: U1.K4 U4.14
SPI1_SCK: U1.J5 U4.13
TX_AI: P1.38 U1.C8
USART1_RX: R7.1 U1.M11
USART1_TX: R6.1 U1.N11
USART2_RX: R3.2 U1.N2
USART2_TX: R2.2 U1.M3
USART3_RX: R5.1 U1.N8
USART3_TX: R4.1 U1.K9
USART6_RX: R9.2 U1.E10
USART6_TX: R8.2 U1.F11
VCAP_DSI: C5.2 C6.2 U1.L12
VDD: C1.2 C7.2 C8.2 C9.2 C10.2 C11.2 C16.2 C17.2 C18.2 C19.2 C20.2 C21.2 C22.2 C23.2 C24.2 C25.2 C26.2 C36.1 C37.1 C38.1 C39.1 C41.1 C46.1 FB1.2 R11.2 R18.1 U1.A3 U1.A9 U1.B1 U1.B2 U1.B7 U1.B12 U1.B13 U1.E2 U1.E12 U1.F12 U1.F13 U1.H1 U1.L9 U1.L11 U1.M2 U1.M13 U1.N10 U3.1 U3.2 U4.5 U4.8
VDDA: C14.2 C15.2 FB1.1 U1.L2 U1.M1
pads on no net: P1.0 P1.11 P1.13 P2.0 P2.20 P2.22 P2.32 P2.34 P2.46 P2.50 P2.52 U1.A2 U1.A8 U1.A10 U1.A13 U1.B3 U1.B10 U1.C1 U1.C2 U1.C3 U1.C4 U1.C6 U1.C7 U1.C9 U1.C10 U1.C11 U1.D2 U1.D3 U1.D4 U1.D7 U1.D8 U1.D11 U1.D12 U1.D13 U1.E1 U1.E3 U1.E4 U1.E6 U1.E7 U1.E8 U1.E9 U1.F6 U1.F7 U1.F8 U1.F9 U1.F10 U1.G1 U1.G2 U1.G3 U1.G4 U1.G5 U1.G6 U1.G7 U1.G8 U1.G9 U1.G10 U1.G11 U1.H3 U1.H4 U1.H7 U1.H10 U1.H12 U1.H13 U1.J3 U1.J4 U1.J6 U1.J7 U1.J8 U1.J12 U1.J13 U1.K1 U1.K2 U1.K5 U1.K6 U1.K7 U1.K8 U1.K10 U1.K12 U1.K13 U1.L4 U1.L6 U1.L7 U1.L8 U1.L10 U1.M5 U1.M8 U1.M10 U1.M12 U1.N12 U1.N13 U3.4

## Text inside footprints (layer, text, board x,y; h text height)
U1: Top Overlay "13" at 12803.11,1474 h50 r90; Top Overlay "1" at 12566.89,1474 h50 r90; Top Overlay "N" at 12471,1166.89 h50; Top Overlay "A" at 12471,1403.11 h50; Mechanical 13 "13" at 12803.11,1474 h50 r90; Mechanical 13 "1" at 12566.89,1474 h50 r90; Mechanical 13 "N" at 12471,1166.89 h50; Mechanical 13 "A" at 12471,1403.11 h50; Bottom Overlay "13" at 12753.11,1474 h50 r270; Bottom Overlay "1" at 12516.89,1474 h50 r270; Bottom Overlay "N" at 12496,1166.89 h50; Bottom Overlay "A" at 12496,1403.11 h50